# Altium PCB VESC_POWER_60100.PcbDoc
Units mm, origin at the board's own origin, x right, y up, seen from the top; angles counter-clockwise.
Board outline 72 x 52 mm, 4 copper layers (Top Layer, Layer 1, Layer 2, Bottom Layer), stack 1.622 mm thick; 52 components, 20 nets, 124 pads, 672 vias.
Unrouted connection lines stored in the file: 70.
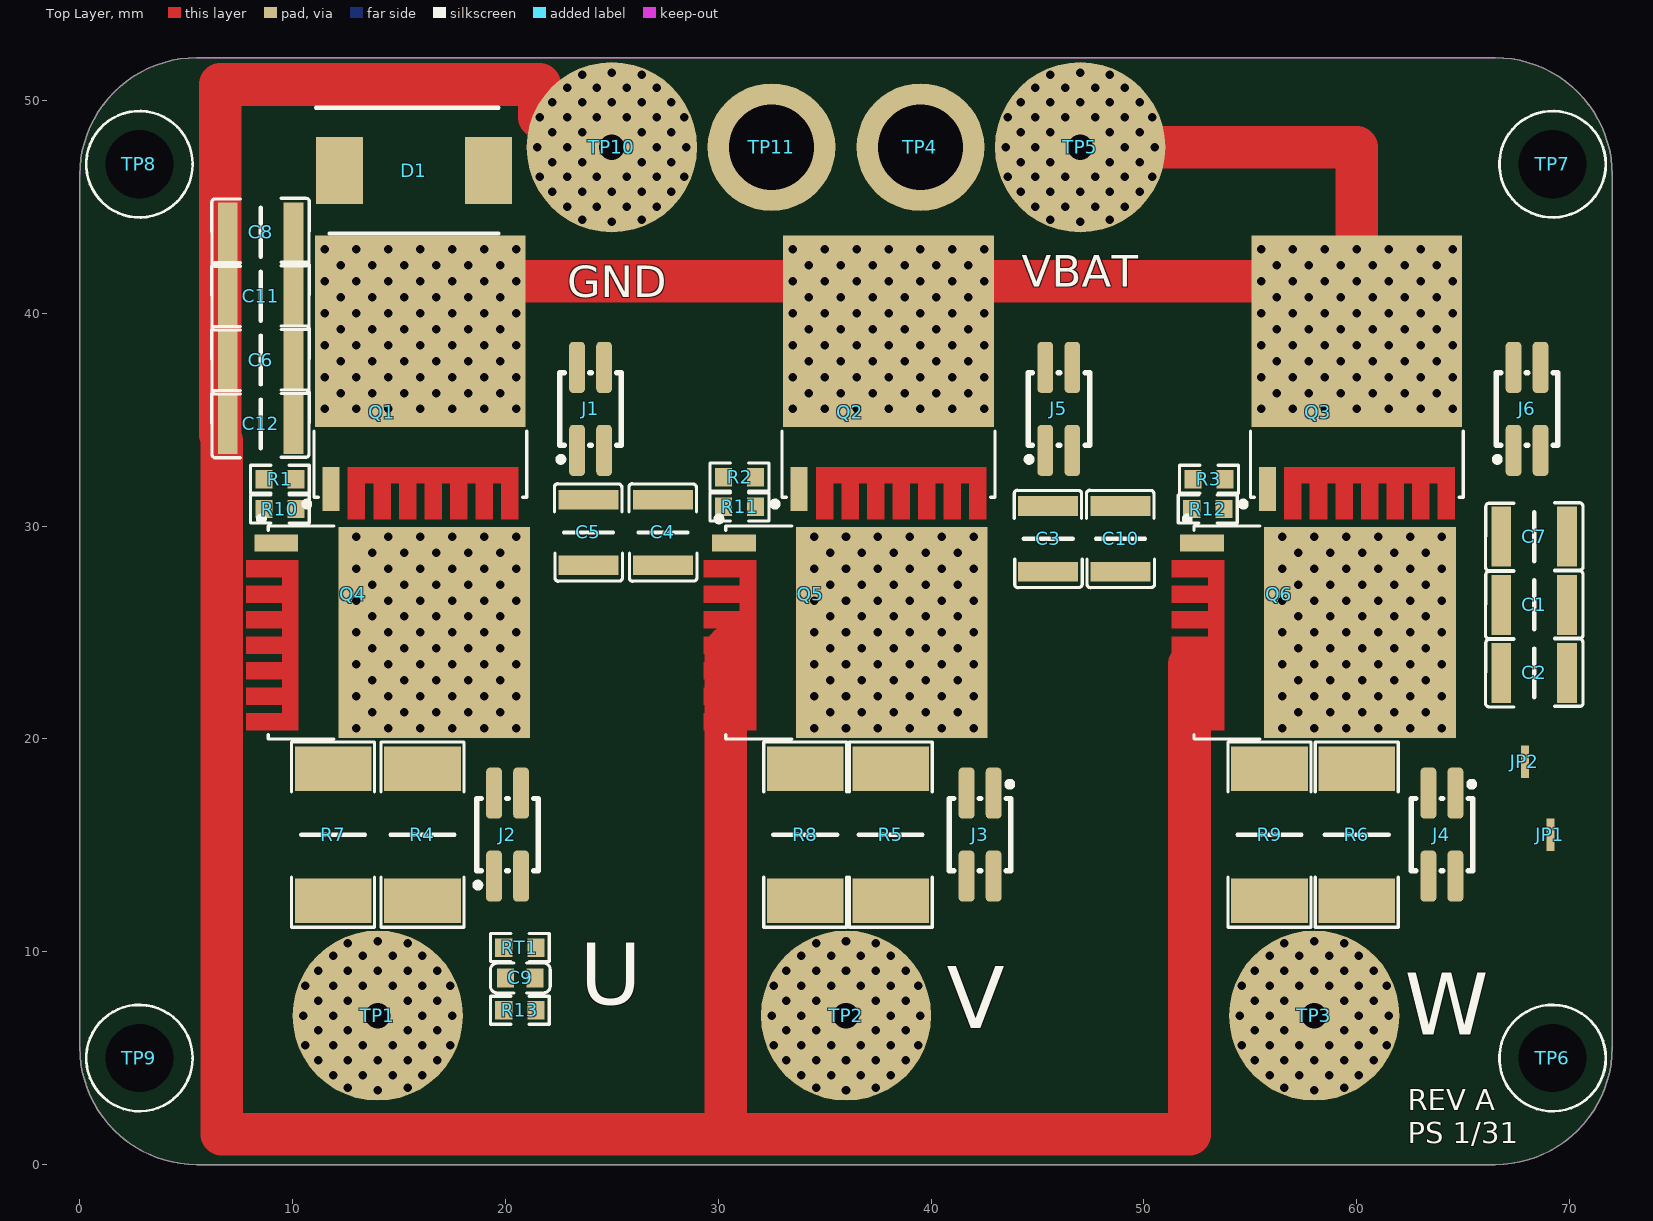
[diagram p0: Top Layer view]
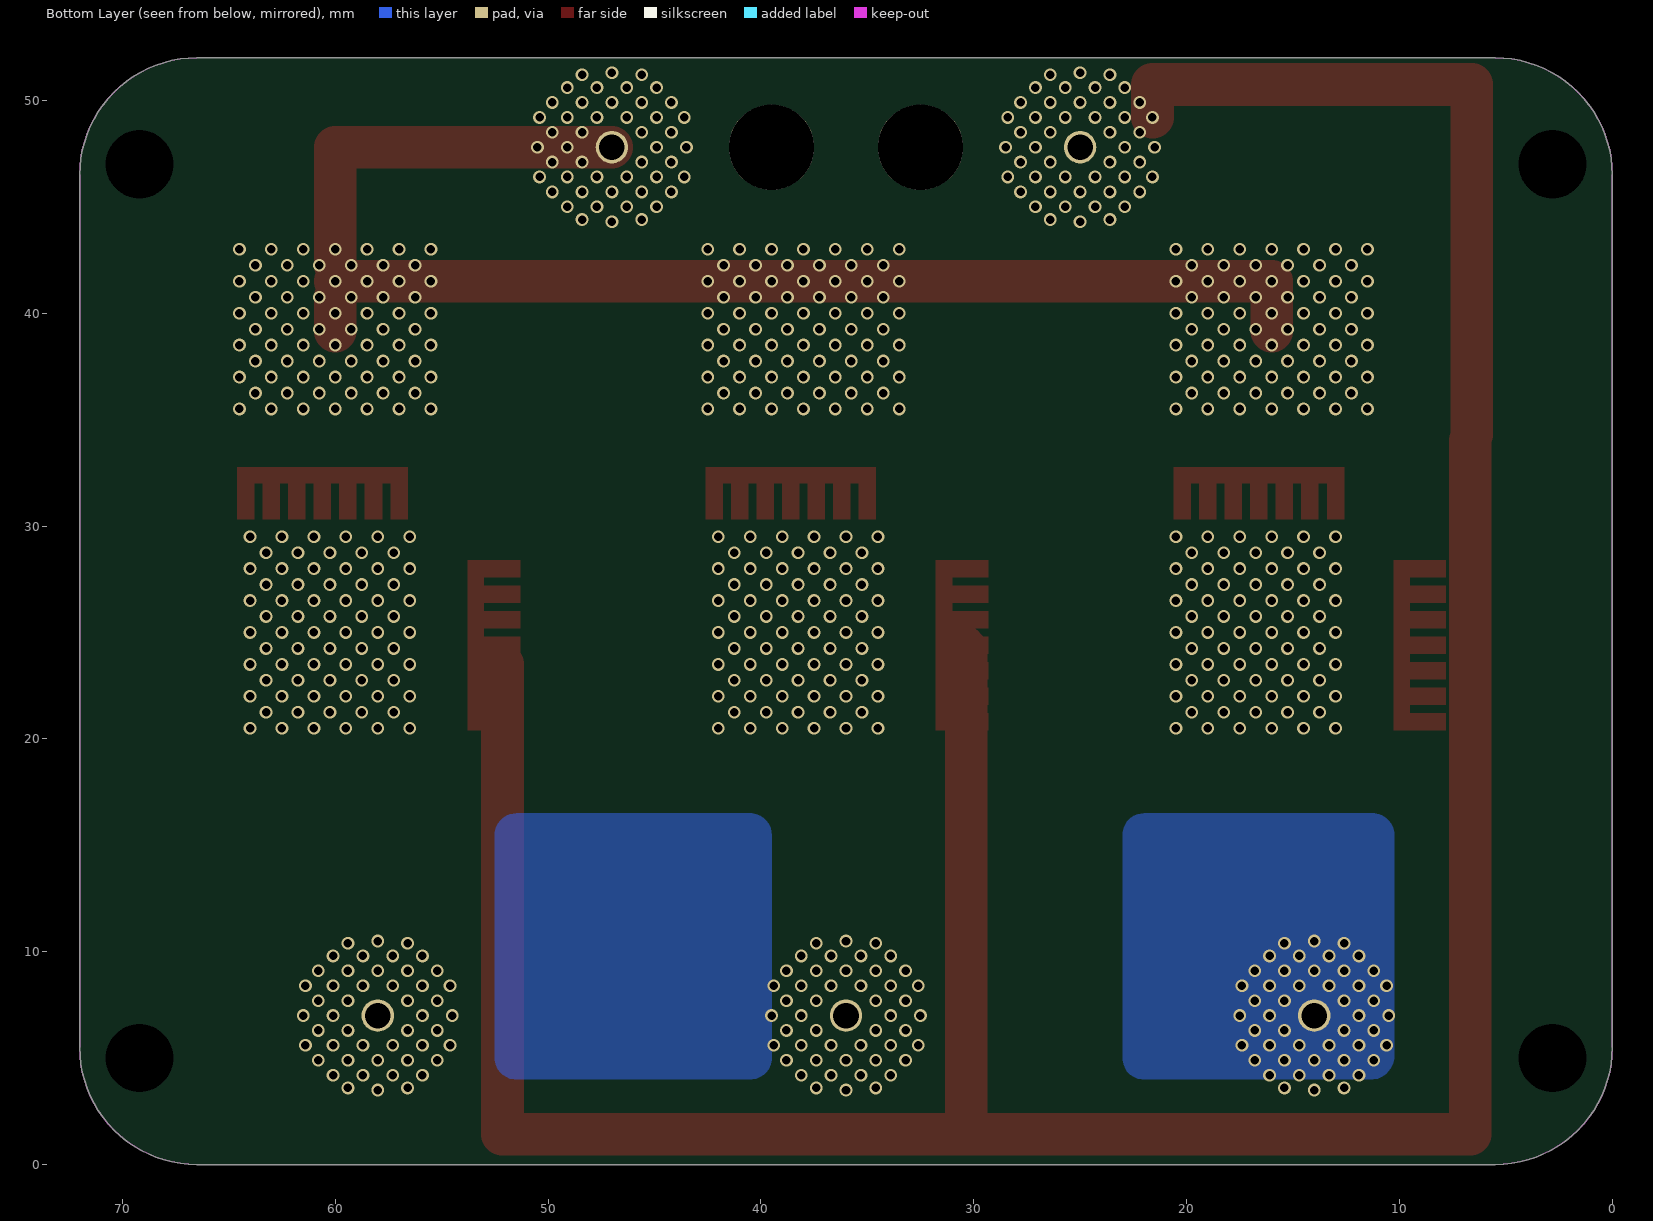
[diagram p1: Bottom Layer view, seen from below]
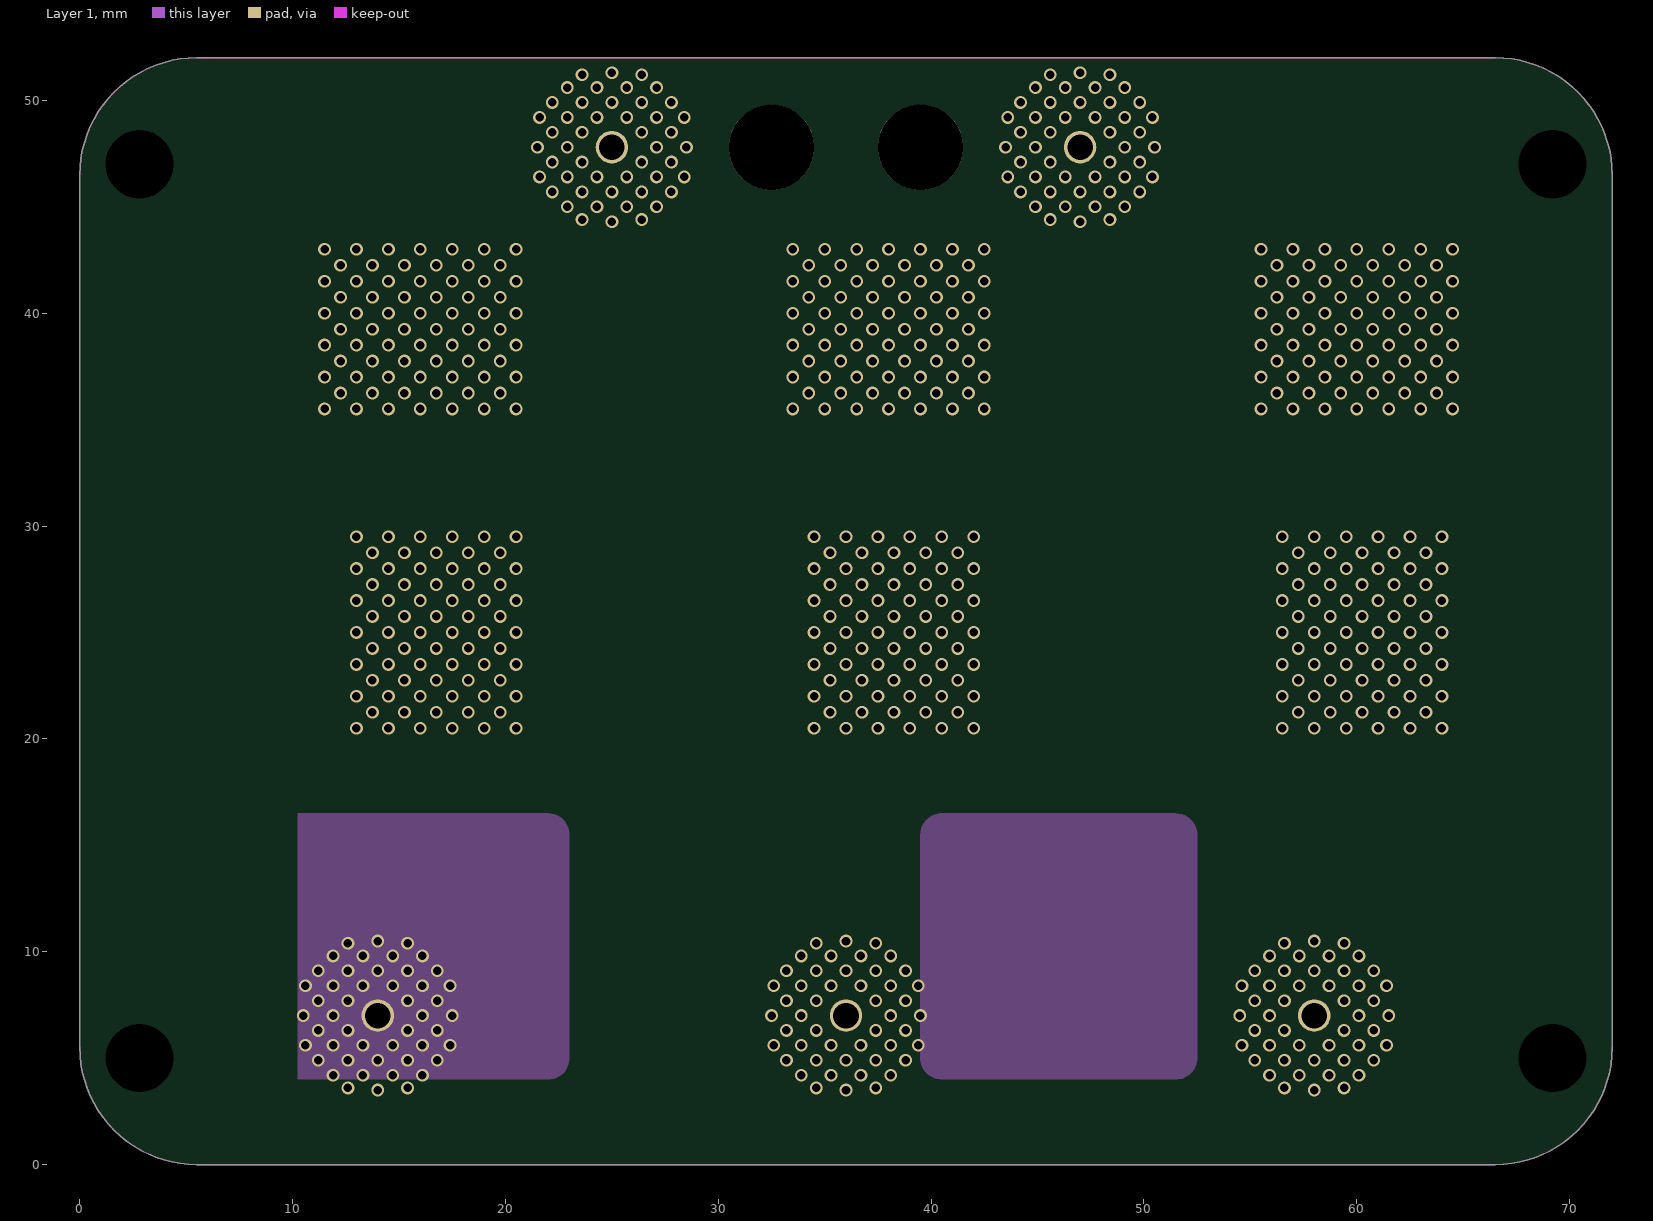
[diagram p2: Layer 1]
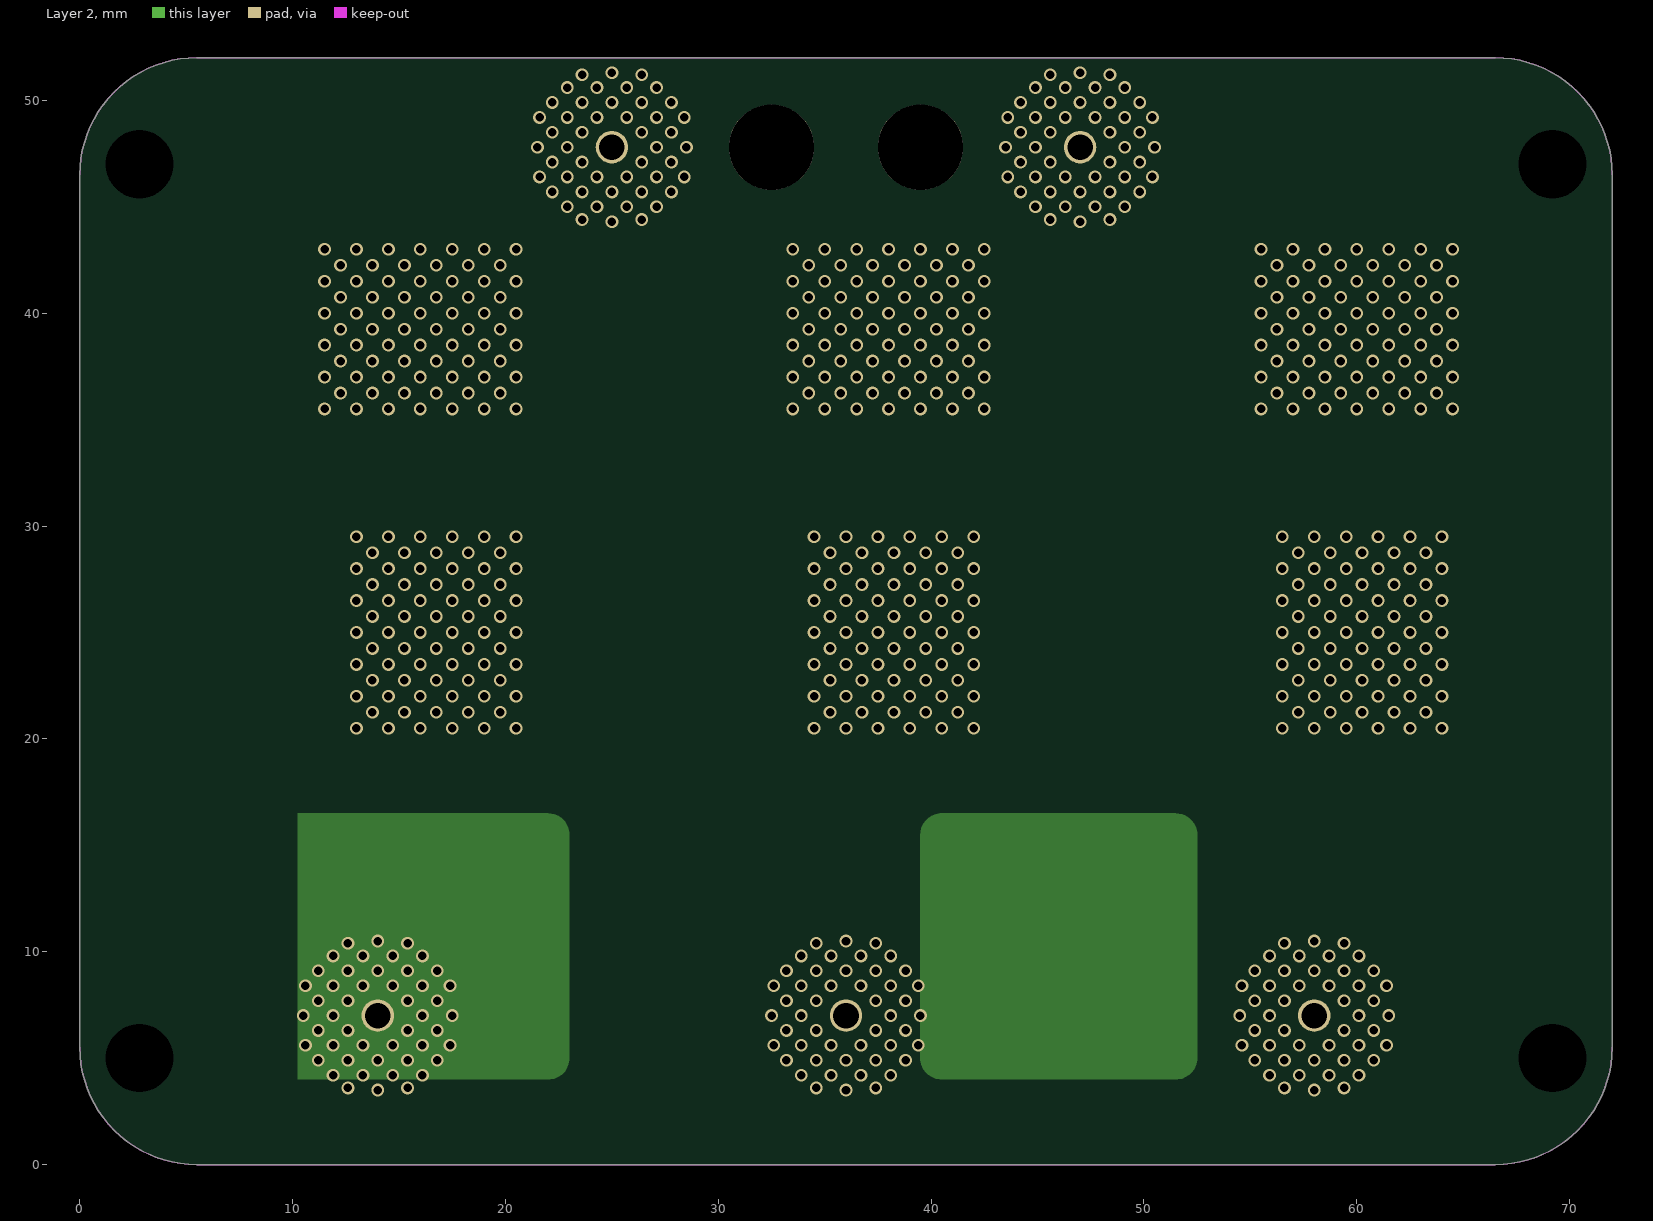
[diagram p3: Layer 2]

## Layer stack, top to bottom
Top Solder: solder mask 0.0102, Solder Resist, Dk 3.5
Top Layer: signal copper 0.035
Dielectric 2: prepreg 0.2083, PP-022, Dk 4.5
Layer 1: signal copper 0.0175
Dielectric 1: core 1.1, Core-024, Dk 4.6
Layer 2: signal copper 0.0175
Dielectric 3: prepreg 0.2083, PP-022, Dk 4.5
Bottom Layer: signal copper 0.035
Bottom Solder: solder mask 0.0102, Solder Resist, Dk 3.5

## Board outline
0,5.5 ccw(c5.5,5.5) 5.5,0 66.5,0 ccw(c66.5,5.5) 72,5.5 72,46.5 ccw(c66.5,46.5) 66.5,52 5.5,52 ccw(c5.5,46.5) 0,46.5

## Design rules (kind name [scope] priority, off if disabled: settings)
BoardOutlineClearance [All] p1: gap=0.254 ignorepadtopadclearanceinfootprint=FALSE except(0: Arc-SplitContinuation Track-SplitContinuation SMDPad-SplitContinuation THPad-SplitContinuation Via-SplitContinuation Fill-SplitContinuation Poly-SplitContinuation Region-SplitContinuation Text-SplitContinuation)
Clearance [All] p1: gap=0.152 ignorepadtopadclearanceinfootprint=FALSE
HoleSize [All] p1: absolutevalues=TRUE maxlimit=5 minlimit=0.025 maxpercent=80.000 minpercent=20.000
HoleToHoleClearance [All] p1: gap=0.229 allowstackedmicrovias=TRUE
MinimumSolderMaskSliver [All] p1: minsoldermaskwidth=0.051
PolygonConnect [All] p1: connectstyle=Direct reliefconductorwidth=0.254 reliefentries=4 polygonreliefangle="90 Angle" airgapwidth=0.254
RoutingVias [All] p1: holewidth=0.711 width=1.27 viastyle="Through Hole" minholewidth=0.711 minwidth=1.27 maxholewidth=0.711 maxwidth=1.27
SilkToSilkClearance [All] p1: silktosilkclearance=0
SilkToSolderMaskClearance [IsPad] p1: minsilkscreentomaskgap=0.025 clearancetoexposedcopper=TRUE
SolderMaskExpansion [All] p1: expansion=0.102 istentingtop=FALSE
SupplyNets "Schematic Supply Nets_2" [InNet('VIN')] p1: voltage=0.000
SupplyNets "Schematic Supply Nets_1" [InNet('3V3')] p2: voltage=0.000
SupplyNets "Schematic Supply Nets" [InNet('GND')] p3: voltage=0.000
Width [All] p1: maxlimit=2.54 minlimit=0.152 preferedwidth=0.254
25 further rules are at their usual default settings.

## Components (designator, comment, footprint, x,y, rotation, side; value= is the part's Value field where it differs from the comment)
C1 "2.2uF/100V" CAPC3225X230N 68.336,26.3 r180 top
C2 "2.2uF/100V" CAPC3225X230N 68.336,23.1 r180 top
C3 "2.2uF/100V" CAPC3225X230N 45.5,29.4 r90 top
C4 "2.2uF/100V" CAPC3225X230N 27.4,29.7 r90 top
C5 "2.2uF/100V" CAPC3225X230N 23.9,29.7 r90 top
C6 "2.2uF/100V" CAPC3225X230N 8.5,37.8 r0 top
C7 "2.2uF/100V" CAPC3225X230N 68.336,29.5 r180 top
C8 "2.2uF/100V" CAPC3225X230N 8.5,43.8 r0 top
C9 "2.2uF/6.3V" C0603 20.696,8.764 r180 top
C10 "2.2uF/100V" CAPC3225X230N 48.9,29.4 r90 top
C11 "2.2uF/100V" CAPC3225X230N 8.5,40.8 r0 top
C12 "2.2uF/100V" CAPC3225X230N 8.5,34.8 r0 top
D1 "SMCJ75A" DIOM7959X262N 15.7,46.7 r0 top
J1 "PZ127-2-02-S" HDR-SMD_4P-P1.27-V-M-R2-C2-LS5.3 24,35.5 r0 top
J2 "PZ127-2-02-S" HDR-SMD_4P-P1.27-V-M-R2-C2-LS5.3 20.1,15.5 r0 top
J3 "PZ127-2-02-S" HDR-SMD_4P-P1.27-V-M-R2-C2-LS5.3 42.3,15.5 r180 top
J4 "PZ127-2-02-S" HDR-SMD_4P-P1.27-V-M-R2-C2-LS5.3 64,15.5 r180 top
J5 "PZ127-2-02-S" HDR-SMD_4P-P1.27-V-M-R2-C2-LS5.3 46,35.5 r0 top
J6 "PZ127-2-02-S" HDR-SMD_4P-P1.27-V-M-R2-C2-LS5.3 68,35.5 r0 top
JP1 "Short" SHORT 69.1,15.5 r90 top
JP2 "Short" SHORT 67.9,18.922 r90 top
Q1 "NCEP023N10LL" TOLL 16,37 r90 top
Q2 "NCEP023N10LL" TOLL 38,37 r90 top
Q3 "NCEP023N10LL" TOLL 60,37 r90 top
Q4 "NCEP023N10LL" TOLL 14.5,25 r0 top
Q5 "NCEP023N10LL" TOLL 36,25 r0 top
Q6 "NCEP023N10LL" TOLL 58,25 r0 top
R1 "5.1K/1%" R0603 9.4,32.2 r0 top
R2 "5.1K/1%" R0603 31,32.3 r0 top
R3 "5.1K/1%" R0603 53.053,32.2 r0 top
R4 "1mR/1%" R2512 16.1,15.5 r90 top
R5 "1mR/1%" R2512 38.1,15.5 r90 top
R6 "1mR/1%" R2512 59.996,15.5 r90 top
R7 "1mR/1%" R2512 11.9,15.5 r90 top
R8 "1mR/1%" R2512 34.084,15.5 r90 top
R9 "1mR/1%" R2512 55.9,15.5 r90 top
R10 "5.1K/1%" R0603 9.4,30.8 r0 top
R11 "5.1K/1%" R0603 31,30.9 r0 top
R12 "5.1K/1%" R0603 53,30.8 r0 top
R13 "10K/1%" R0603 20.676,7.249 r0 top
RT1 "NTC" R0603 20.676,10.194 r0 top
TP1 "PHA" TP_8x8 14,7 r0 top
TP2 "PHB" TP_8x8 36,7 r0 top
TP3 "PHC" TP_8x8 58,7 r0 top
TP4 "GND" TP_6x6 39.5,47.8 r180 top
TP5 "GND" TP_8x8 47,47.8 r180 top
TP6 "TEST POINT" HOLE-3.2MM_M 69.2,5 r0 top
TP7 "TEST POINT" HOLE-3.2MM_M 69.2,47 r0 top
TP8 "TEST POINT" HOLE-3.2MM_M 2.8,47 r0 top
TP9 "TEST POINT" HOLE-3.2MM_M 2.8,5 r0 top
TP10 "VIN" TP_8x8 25,47.8 r180 top
TP11 "VIN" TP_6x6 32.5,47.8 r180 top

## Footprints (in the part's own frame and the unit in brackets; to place one, negate y for a bottom-side part, rotate by r counter-clockwise, add the part's x,y. Pads: shape width x height; smd on the part's side, far side on the other; paste and mask are expansions set on the pad)
C0603 [mm] "C0603"
  rect 0.8x0.9 smd: 1(-0.7,0) 2(0.7,0)
  silkscreen extent -1.41,-0.7 1.4,0.7, body extent -0.8,-0.41 0.8,0.41, height 0.9
CAPC3225X230N [mm]
  rect 0.92x2.82 smd: 1(-1.54,0) 2(1.54,0)
  silkscreen extent -2.3,-1.6 2.28,1.6, body extent -1.6,-1.25 1.6,1.25, height 2.47
DIOM7959X262N [mm]
  rect 2.2x3.15 smd: 1(-3.5,0) 2(3.5,0)
  silkscreen extent -4.6,-2.95 3.97,2.95, body extent -3.97,-2.95 3.97,2.95, height 2.31
HDR-SMD_4P-P1.27-V-M-R2-C2-LS5.3 [mm]
  rrect50% 0.74x2.4 smd paste+0 mask+0.05: 1(-0.635,-1.95) 2(-0.635,1.95) 3(0.635,-1.95) 4(0.635,1.95)
  silkscreen extent -1.52,-2.49 1.45,1.7, body extent -1.27,-2.65 1.27,2.65, height 5.5
HOLE-3.2MM_M [mm]
  round 0 hole 3.2 unplated: 1(0,0)
  silkscreen extent -2.5,-2.5 2.5,2.5
R0603 [mm] "R0603"
  rect 0.806x0.864 smd: 1(-0.753,0) 2(0.753,0)
  silkscreen extent -1.38,-0.66 1.39,0.66, body extent -0.79,-0.43 0.79,0.43, height 0.5
R2512 [mm]
  rect 2.1x3.6 smd: 1(-3.1,0) 2(3.1,0)
  silkscreen extent -4.35,-1.95 4.35,1.95, body extent -3.2,-1.6 3.2,1.6, height 0.8
SHORT [mil] "SHORT"
  rect 30x15 smd paste-99999 mask+0: 1(-14.9,0) 2(14.9,0)
TOLL [mm] "TOLL"
  rect 2.063x0.8 smd: 1(-5.269,4.2)
  rect 9x9.9 smd: 2(2.15,0)
  oct 0.025x0.025 smd: 3(-5.46,-0.6)
  round 0.025 smd: 3(-5.46,-0.6)
  Top Layer region: -6.691,3.4 -4.228,3.4 -4.228,-4.6 -6.691,-4.6 -6.691,-3.8 -4.991,-3.8 -4.991,-3.4 -6.691,-3.4 -6.691,-2.6 -4.991,-2.6 -4.991,-2.2 -6.691,-2.2 -6.691,-1.4 -4.991,-1.4 -4.991,-1 -6.691,-1 -6.691,-0.2 -4.991,-0.2 -4.991,0.2 -6.691,0.2 -6.691,1 -4.991,1 -4.991,1.4 -6.691,1.4 -6.691,2.2 -4.991,2.2 -4.991,2.6 -6.691,2.6
  silkscreen extent -6.1,-5 -2.55,5.46, body extent -6.04,-4.95 5.63,4.95, height 2.3
TP_6x6 [mm] "TP_6x6"
  round 6 smd: 1(0,0)
  round 4 hole 4: 1(0,0)
  body extent -2.75,-2.75 2.74,2.75, height 6
TP_8x8 [mm] "TP_8X8"
  round 8 smd: 1(0,0)
  round 1.524 hole 1.2: 1(0,0)
  body extent -3.75,-3.75 3.74,3.75, height 23

## Part data
C1 C2 C3 C4 C5 C6 C7 C8 C9 C10 C11 C12: library part "CAP NP"
  C1 C2 C3 C4 C5 C6 C7 C8 C10 C11 C12: PCB Footprint=C1206
  C9: PCB Footprint=C0603
D1: "TVS Diode (Uni-directional)", Manufacturer_Name=Bourns, Mouser Part Number=652-SMCJ75A, Arrow Part Number=SMCJ75A, Arrow Price/Stock=https://www.arrow.com/en/products/smcj75a/bourns?region=nac, Datasheet Link=https://www.bourns.com/docs/Product-Datasheets/SMCJ.pdf, Height=2.62mm, Manufacturer_Part_Number=SMCJ75A, Mouser Price/Stock=https://www.mouser.co.uk/ProductDetail/Bourns/SMCJ75A?qs=%252Bf8Cd6aE5bzxrdYbQ%252Bf9mA%3D%3D
J1 J2 J3 J4 J5 J6: Color=黑色, Current Rating (Max)=1A, JLCPCB Part Class="Extended Part", LCSC Part Name="2x2P 间距:1.27mm 方针 立贴", Manufacturer=HCTL(华灿天禄), Operating Temperature Range=-40℃~+105℃, Soldering Temperature(Max)=260℃@10S, Add into BOM=yes, Circluar Pins/Square Pins=方针, Contact Material=黄铜, Convert to PCB=yes, Datasheet=https://atta.szlcsc.com/upload/public/pdf/source/20230609/2ACB07ADC7D4DAF6D292F3D23C037F6C.pdf, Device=PZ127-2-02-S, Insulation Height=1.5mm, Length of End Connection Pin=-, Length of Mating Pin=4mm, Manufacturer Part=PZ127-2-02-S, Mounting Type=立贴, Number of Pins=4P, Number of Rows=双排, Pin Structure=2x2P, Pitch=1.27mm, Row Spacing=1.27mm, Supplier=LCSC, Supplier Footprint=SMD,P=1.27mm, Supplier Part=C3975185, Symbol=PZ127-2-02-S
JP1 JP2: library part SHORT, "2 PIN SHORTED TO CONNECT DIFFERENT NETS", CLASS=DISCRETE, PART_NUMBER=TMP-442
Q1 Q2 Q3 Q4 Q5 Q6: library part "MOSFET N", PCB Footprint=TOLL
R1 R2 R3 R4 R5 R6 R7 R8 R9 R10 R11 R12 R13: library part RESISTOR
  R1 R2 R3 R10 R11 R12 R13: PCB Footprint=R0603
  R4 R5 R6 R7 R8 R9: PCB Footprint=R3920
TP1 TP2 TP3 TP4 TP5 TP10 TP11: library part "TEST POINT", PCB Footprint=TP_8x8
RT1: PCB Footprint=R0603

## Via types
v1: diameter 0.6, hole 0.4, Top Layer to Bottom Layer, tented both sides, 672 vias

## Nets (pads, with @x,y where several pads share a name; then routed paths per layer and width w, separated by ;. In a path a pad name is that pad's centre, name@x,y a point inside that pad or via, vN(x,y) a via of type N, cw(c..) or ccw(c..) an arc to the next point about the centre after c; other vN are vias at no path point)
3V3: RT1.1
ADC_TEMP: C9.1 J2.4 R13.2 RT1.2
ADC_TEMP2: J3.4
ADC_TEMP3: J4.4
GHA: J2.1 Q1.1 R1.2
GHB: J4.1 Q2.1 R2.2
GHC: J1.2 Q3.1 R3.2
GLA: J2.2 Q4.1 R10.2
GLB: J4.2 Q5.1 R11.2
GLC: J1.1 Q6.1 R12.2
GND: C1.1 C2.1 C3.1 C4.1 C5.1 C6.1 C7.1 C8.1 C9.2 C10.1 C11.1 C12.1 D1.2 J3.2 JP1.1 JP2.1 Q4.3 Q5.3 Q6.3 R10.1 R11.1 R12.1 R13.1 TP10.1 TP11.1 | length 156.2
  Top Layer w2: C12.1@6.6,34.3 6.6,37.8 6.6,40.8 6.6,43.8 6.6,50.746 21.6,50.746 v1(21.6,49.2) ; C12.1@6.66,34 6.66,1.414 30.345,1.414 ; Q5.3@30.54,24.4 30.345,24.205 30.345,1.414 ; 52.14,23.5 52.14,1.414 30.345,1.414
  other v1: 25,44.3 23.6,44.4 26.4,44.4 22.9,45 24.3,45 25.7,45 27.1,45 22.2,45.7 23.6,45.7 25,45.7 26.4,45.7 27.8,45.7 21.6,46.4 22.9,46.4 24.3,46.4 25.7,46.4 27.1,46.4 28.4,46.4 22.2,47.1 23.6,47.1 26.4,47.1 27.8,47.1 21.5,47.8 22.9,47.8 27.1,47.8 28.5,47.8 22.2,48.5 23.6,48.5 26.4,48.5 27.8,48.5 22.9,49.2 24.3,49.2 25.7,49.2 27.1,49.2 28.4,49.2 22.2,49.9 23.6,49.9 25,49.9 26.4,49.9 27.8,49.9 22.9,50.6 24.3,50.6 25.7,50.6 27.1,50.6 23.6,51.2 26.4,51.2 25,51.3
NetJ1_3: J1.3 JP1.2
NetJ3_3: J3.3 JP2.2
PHA: R4.1 R7.1 TP1.1
  other v1: 14,3.5 12.6,3.6 15.4,3.6 11.9,4.2 13.3,4.2 14.7,4.2 16.1,4.2 11.2,4.9 12.6,4.9 14,4.9 15.4,4.9 16.8,4.9 10.6,5.6 11.9,5.6 13.3,5.6 14.7,5.6 16.1,5.6 17.4,5.6 11.2,6.3 12.6,6.3 15.4,6.3 16.8,6.3 10.5,7 11.9,7 16.1,7 17.5,7 11.2,7.7 12.6,7.7 15.4,7.7 16.8,7.7 10.6,8.4 11.9,8.4 13.3,8.4 14.7,8.4 16.1,8.4 17.4,8.4 11.2,9.1 12.6,9.1 14,9.1 15.4,9.1 16.8,9.1 11.9,9.8 13.3,9.8 14.7,9.8 16.1,9.8 12.6,10.4 15.4,10.4 14,10.5
PHB: R5.1 R8.1 TP2.1
  other v1: 36,3.5 34.6,3.6 37.4,3.6 33.9,4.2 35.3,4.2 36.7,4.2 38.1,4.2 33.2,4.9 34.6,4.9 36,4.9 37.4,4.9 38.8,4.9 32.6,5.6 33.9,5.6 35.3,5.6 36.7,5.6 38.1,5.6 39.4,5.6 33.2,6.3 34.6,6.3 37.4,6.3 38.8,6.3 32.5,7 33.9,7 38.1,7 39.5,7 33.2,7.7 34.6,7.7 37.4,7.7 38.8,7.7 32.6,8.4 33.9,8.4 35.3,8.4 36.7,8.4 38.1,8.4 39.4,8.4 33.2,9.1 34.6,9.1 36,9.1 37.4,9.1 38.8,9.1 33.9,9.8 35.3,9.8 36.7,9.8 38.1,9.8 34.6,10.4 37.4,10.4 36,10.5
PHC: R6.1 R9.1 TP3.1
  other v1: 58,3.5 56.6,3.6 59.4,3.6 55.9,4.2 57.3,4.2 58.7,4.2 60.1,4.2 55.2,4.9 56.6,4.9 58,4.9 59.4,4.9 60.8,4.9 54.6,5.6 55.9,5.6 57.3,5.6 58.7,5.6 60.1,5.6 61.4,5.6 55.2,6.3 56.6,6.3 59.4,6.3 60.8,6.3 54.5,7 55.9,7 60.1,7 61.5,7 55.2,7.7 56.6,7.7 59.4,7.7 60.8,7.7 54.6,8.4 55.9,8.4 57.3,8.4 58.7,8.4 60.1,8.4 61.4,8.4 55.2,9.1 56.6,9.1 58,9.1 59.4,9.1 60.8,9.1 55.9,9.8 57.3,9.8 58.7,9.8 60.1,9.8 56.6,10.4 59.4,10.4 58,10.5
SHA: J2.3 Q1.3 Q4.2 R1.1 R4.2 R7.2
  other v1: 13,20.5 14.5,20.5 16,20.5 17.5,20.5 19,20.5 20.5,20.5 13.75,21.25 15.25,21.25 16.75,21.25 18.25,21.25 19.75,21.25 13,22 14.5,22 16,22 17.5,22 19,22 20.5,22 13.75,22.75 15.25,22.75 16.75,22.75 18.25,22.75 19.75,22.75 13,23.5 14.5,23.5 16,23.5 17.5,23.5 19,23.5 20.5,23.5 13.75,24.25 15.25,24.25 16.75,24.25 18.25,24.25 19.75,24.25 13,25 14.5,25 16,25 17.5,25 19,25 20.5,25 13.75,25.75 15.25,25.75 16.75,25.75 18.25,25.75 19.75,25.75 13,26.5 14.5,26.5 16,26.5 17.5,26.5 19,26.5 20.5,26.5 13.75,27.25 15.25,27.25 16.75,27.25 18.25,27.25 19.75,27.25 13,28 14.5,28 16,28 17.5,28 19,28 20.5,28 13.75,28.75 15.25,28.75 16.75,28.75 18.25,28.75 19.75,28.75 13,29.5 14.5,29.5 16,29.5 17.5,29.5 19,29.5 20.5,29.5
SHB: J4.3 Q2.3 Q5.2 R2.1 R5.2 R8.2
  other v1: 34.5,20.5 36,20.5 37.5,20.5 39,20.5 40.5,20.5 42,20.5 35.25,21.25 36.75,21.25 38.25,21.25 39.75,21.25 41.25,21.25 34.5,22 36,22 37.5,22 39,22 40.5,22 42,22 35.25,22.75 36.75,22.75 38.25,22.75 39.75,22.75 41.25,22.75 34.5,23.5 36,23.5 37.5,23.5 39,23.5 40.5,23.5 42,23.5 35.25,24.25 36.75,24.25 38.25,24.25 39.75,24.25 41.25,24.25 34.5,25 36,25 37.5,25 39,25 40.5,25 42,25 35.25,25.75 36.75,25.75 38.25,25.75 39.75,25.75 41.25,25.75 34.5,26.5 36,26.5 37.5,26.5 39,26.5 40.5,26.5 42,26.5 35.25,27.25 36.75,27.25 38.25,27.25 39.75,27.25 41.25,27.25 34.5,28 36,28 37.5,28 39,28 40.5,28 42,28 35.25,28.75 36.75,28.75 38.25,28.75 39.75,28.75 41.25,28.75 34.5,29.5 36,29.5 37.5,29.5 39,29.5 40.5,29.5 42,29.5
SHC: J1.4 Q3.3 Q6.2 R3.1 R6.2 R9.2
  other v1: 56.5,20.5 58,20.5 59.5,20.5 61,20.5 62.5,20.5 64,20.5 57.25,21.25 58.75,21.25 60.25,21.25 61.75,21.25 63.25,21.25 56.5,22 58,22 59.5,22 61,22 62.5,22 64,22 57.25,22.75 58.75,22.75 60.25,22.75 61.75,22.75 63.25,22.75 56.5,23.5 58,23.5 59.5,23.5 61,23.5 62.5,23.5 64,23.5 57.25,24.25 58.75,24.25 60.25,24.25 61.75,24.25 63.25,24.25 56.5,25 58,25 59.5,25 61,25 62.5,25 64,25 57.25,25.75 58.75,25.75 60.25,25.75 61.75,25.75 63.25,25.75 56.5,26.5 58,26.5 59.5,26.5 61,26.5 62.5,26.5 64,26.5 57.25,27.25 58.75,27.25 60.25,27.25 61.75,27.25 63.25,27.25 56.5,28 58,28 59.5,28 61,28 62.5,28 64,28 57.25,28.75 58.75,28.75 60.25,28.75 61.75,28.75 63.25,28.75 56.5,29.5 58,29.5 59.5,29.5 61,29.5 62.5,29.5 64,29.5
VIN: C1.2 C2.2 C3.2 C4.2 C5.2 C6.2 C7.2 C8.2 C10.2 C11.2 C12.2 D1.1 J3.1 Q1.2 Q2.2 Q3.2 TP4.1 TP5.1 | length 66.5
  Top Layer w2: Q1.2 v1(16,40) v1(16,41.5) v1(17.5,41.5) v1(19,41.5) v1(20.5,41.5) v1(33.5,41.5) v1(35,41.5) v1(36.5,41.5) v1(38,41.5) v1(39.5,41.5) v1(41,41.5) v1(42.5,41.5) v1(55.5,41.5) v1(57,41.5) v1(58.5,41.5) v1(60,41.5) ; TP5.1@47,47.8 v1(49.1,47.8) v1(50.5,47.8) 60,47.8 v1(60,43) Q3.2@60,42.25 ; Q3.2 v1(60,40) Q3.2@60,40.75
  other v1: 11.5,35.5 13,35.5 14.5,35.5 16,35.5 17.5,35.5 19,35.5 20.5,35.5 33.5,35.5 35,35.5 36.5,35.5 38,35.5 39.5,35.5 41,35.5 42.5,35.5 55.5,35.5 57,35.5 58.5,35.5 60,35.5 61.5,35.5 63,35.5 64.5,35.5 12.25,36.25 13.75,36.25 15.25,36.25 16.75,36.25 18.25,36.25 19.75,36.25 34.25,36.25 35.75,36.25 37.25,36.25 38.75,36.25 40.25,36.25 41.75,36.25 56.25,36.25 57.75,36.25 59.25,36.25 60.75,36.25 62.25,36.25 63.75,36.25 11.5,37 13,37 14.5,37 16,37 17.5,37 19,37 20.5,37 33.5,37 35,37 36.5,37 38,37 39.5,37 41,37 42.5,37 55.5,37 57,37 58.5,37 60,37 61.5,37 63,37 64.5,37 12.25,37.75 13.75,37.75 15.25,37.75 16.75,37.75 18.25,37.75 19.75,37.75 34.25,37.75 35.75,37.75 37.25,37.75 38.75,37.75 40.25,37.75 41.75,37.75 56.25,37.75 57.75,37.75 59.25,37.75 60.75,37.75 62.25,37.75 63.75,37.75 11.5,38.5 13,38.5 14.5,38.5 16,38.5 17.5,38.5 19,38.5 20.5,38.5 33.5,38.5 35,38.5 36.5,38.5 38,38.5 39.5,38.5 41,38.5 42.5,38.5 55.5,38.5 57,38.5 58.5,38.5 60,38.5 61.5,38.5 63,38.5 64.5,38.5 12.25,39.25 13.75,39.25 15.25,39.25 16.75,39.25 18.25,39.25 19.75,39.25 34.25,39.25 35.75,39.25 37.25,39.25 38.75,39.25 40.25,39.25 41.75,39.25 56.25,39.25 57.75,39.25 59.25,39.25 60.75,39.25 62.25,39.25 63.75,39.25 11.5,40 13,40 14.5,40 17.5,40 19,40 20.5,40 33.5,40 35,40 36.5,40 38,40 39.5,40 41,40 42.5,40 55.5,40 57,40 58.5,40 61.5,40 63,40 64.5,40 12.25,40.75 13.75,40.75 15.25,40.75 16.75,40.75 18.25,40.75 19.75,40.75 34.25,40.75 35.75,40.75 37.25,40.75 38.75,40.75 40.25,40.75 41.75,40.75 56.25,40.75 57.75,40.75 59.25,40.75 60.75,40.75 62.25,40.75 63.75,40.75 11.5,41.5 13,41.5 14.5,41.5 61.5,41.5 63,41.5 64.5,41.5 12.25,42.25 13.75,42.25 15.25,42.25 16.75,42.25 18.25,42.25 19.75,42.25 34.25,42.25 35.75,42.25 37.25,42.25 38.75,42.25 40.25,42.25 41.75,42.25 56.25,42.25 57.75,42.25 59.25,42.25 60.75,42.25 62.25,42.25 63.75,42.25 11.5,43 13,43 14.5,43 16,43 17.5,43 19,43 20.5,43 33.5,43 35,43 36.5,43 38,43 39.5,43 41,43 42.5,43 55.5,43 57,43 58.5,43 61.5,43 63,43 64.5,43 47,44.3 45.6,44.4 48.4,44.4 44.9,45 46.3,45 47.7,45 49.1,45 44.2,45.7 45.6,45.7 47,45.7 48.4,45.7 49.8,45.7 43.6,46.4 44.9,46.4 46.3,46.4 47.7,46.4 49.1,46.4 50.4,46.4 44.2,47.1 45.6,47.1 48.4,47.1 49.8,47.1 43.5,47.8 44.9,47.8 44.2,48.5 45.6,48.5 48.4,48.5 49.8,48.5 43.6,49.2 44.9,49.2 46.3,49.2 47.7,49.2 49.1,49.2 50.4,49.2 44.2,49.9 45.6,49.9 47,49.9 48.4,49.9 49.8,49.9 44.9,50.6 46.3,50.6 47.7,50.6 49.1,50.6 45.6,51.2 48.4,51.2 47,51.3
pads on no net: J5.1 J5.2 J5.3 J5.4 J6.1 J6.2 J6.3 J6.4 TP6.1 TP7.1 TP8.1 TP9.1

## Polygon pours and split planes (outlines as drawn)
PHB on Bottom Layer "PHB_L04_P044" (solid, pour order 44): 52.5,5 52.5,15.5 ccw(c51.5,15.5) 51.5,16.5 40.5,16.5 ccw(c40.5,15.5) 39.5,15.5 39.5,5 ccw(c40.5,5) 40.5,4 51.5,4 ccw(c51.5,5)
PHA on Bottom Layer "PHA_L04_P043" (solid, pour order 43): 10.25,5.094 ccw(c11.344,5.094) 11.344,4 22,4 ccw(c22,5) 23,5 23,15.5 ccw(c22,15.5) 22,16.5 11.44,16.5 11.248,16.5 ccw(c11.248,15.502) 10.25,15.502
PHB on Layer 1 "PHB_L02_P031" (solid, pour order 31): 52.5,5 52.5,15.5 ccw(c51.5,15.5) 51.5,16.5 40.5,16.5 ccw(c40.5,15.5) 39.5,15.5 39.5,5 ccw(c40.5,5) 40.5,4 51.5,4 ccw(c51.5,5)
PHA on Layer 1 "PHA_L02_P027" (solid, pour order 27): 23,5 23,15.5 ccw(c22,15.5) 22,16.5 10.234,16.5 10.234,4 22,4 ccw(c22,5)
PHB on Layer 2 "PHB_L03_P035" (solid, pour order 35): 52.5,5 52.5,15.5 ccw(c51.5,15.5) 51.5,16.5 40.5,16.5 ccw(c40.5,15.5) 39.5,15.5 39.5,5 ccw(c40.5,5) 40.5,4 51.5,4 ccw(c51.5,5)
PHA on Layer 2 "PHA_L03_P034" (solid, pour order 34): 23,5 23,15.5 ccw(c22,15.5) 22,16.5 10.249,16.5 10.249,4 22,4 ccw(c22,5)

## Keep-outs
Keep-Out Layer:
  lines w0.025: 66.5,0 ccw(c66.5,5.5) 72,5.5 72,46.5 ccw(c66.5,46.5) 66.5,52 ; 66.5,0 5.5,0 cw(c5.5,5.5) 0,5.5 0,46.5 cw(c5.5,46.5) 5.5,52 66.5,52 ; 66.5,52 66.5,52

## Silkscreen, mask and mechanical layers (free items; w line width, h text height)
Top Overlay:
  text "VBAT" at 44.251,41.25 h1.5
  text "GND" at 22.901,40.75 h1.5
  text "U" at 23.482,6.542 h5
  text "V" at 40.728,5.442 h5
  text "W" at 62.245,5.142 h5
  text "REV A" at 62.405,2.541 h1
  text "PS 1/31" at 62.405,0.995 h1
Drill Drawing:
  circle w0.254: c4.318,67.13 r0.7
  lines w0.254: 3.618,69.579 5.018,69.579 5.018,70.978 3.618,70.978 3.618,69.579 ; 3.618,74.127 5.018,74.127 4.318,72.728 3.618,74.127 ; 3.618,76.226 3.968,76.226 4.318,75.876 4.668,76.226 5.018,76.226 4.668,76.576 5.018,76.926 4.668,76.926 4.318,77.275 3.968,76.926 3.618,76.926 3.968,76.576 3.618,76.226
  lines w0.381: 2.349,65.486 94.193,65.486 ; 2.349,78.08 94.193,78.08 ; 10.446,62.337 10.446,81.229 ; 17.859,62.337 17.859,81.229 ; 32.53,62.337 32.53,81.229 ; 38.809,62.337 38.809,81.229 ; 47.95,62.337 47.95,81.229 ; 65.247,62.337 65.247,81.229 ; 72.736,62.337 72.736,81.229 ; 82.522,62.337 82.522,81.229 ; 2.349,62.337 94.193,62.337 94.193,81.229 2.349,81.229 2.349,62.337
  text "Symbol" at 4.239,79.025 h1.83
  text "Count" at 11.39,79.025 h1.83
  text "Hole Size" at 18.803,79.025 h1.83
  text "Plated" at 33.474,79.025 h1.83
  text "Hole Type" at 39.753,79.025 h1.83
  text "Drill Layer Pair" at 48.894,79.025 h1.83
  text "Via/Pad" at 66.191,79.025 h1.83
  text "Pad Shape" at 73.681,79.025 h1.83
  text "Template" at 83.466,79.025 h1.83
  text "2" at 11.39,75.876 h1.52
  text "4.000mm (157.48mil)" at 18.803,75.876 h1.52
  text "PTH" at 33.474,75.876 h1.52
  text "Round" at 39.753,75.876 h1.52
  text "Top Layer - Bottom Layer" at 48.894,75.876 h1.52
  text "Pad" at 66.191,75.876 h1.52
  text "Rounded" at 73.681,75.876 h1.52
  text "c400h400" at 83.466,75.876 h1.52
  text "4" at 11.39,72.728 h1.52
  text "3.200mm (125.98mil)" at 18.803,72.728 h1.52
  text "NPTH" at 33.474,72.728 h1.52
  text "Round" at 39.753,72.728 h1.52
  text "Top Layer - Bottom Layer" at 48.894,72.728 h1.52
  text "Pad" at 66.191,72.728 h1.52
  text "Rounded" at 73.681,72.728 h1.52
  text "c0hn320" at 83.466,72.728 h1.52
  text "5" at 11.39,69.579 h1.52
  text "1.200mm (47.24mil)" at 18.803,69.579 h1.52
  text "PTH" at 33.474,69.579 h1.52
  text "Round" at 39.753,69.579 h1.52
  text "Top Layer - Bottom Layer" at 48.894,69.579 h1.52
  text "Pad" at 66.191,69.579 h1.52
  text "Rounded" at 73.681,69.579 h1.52
  text "c152h120" at 83.466,69.579 h1.52
  text "672" at 11.39,66.43 h1.52
  text "0.400mm (15.75mil)" at 18.803,66.43 h1.52
  text "PTH" at 33.474,66.43 h1.52
  text "Round" at 39.753,66.43 h1.52
  text "Top Layer - Bottom Layer" at 48.894,66.43 h1.52
  text "Via" at 66.191,66.43 h1.52
  text "Rounded" at 73.681,66.43 h1.52
  text "v60h40m0mx0" at 83.466,66.43 h1.52
  text "683 Total" at 11.39,63.282 h1.52

## Text inside footprints (layer, text, board x,y; h text height)
C9: Mechanical 8 "1" at 21.65,8.764 h0.64 r180; Mechanical 8 "2" at 20.25,8.764 h0.64 r180
Q1: Mechanical 8 "1" at 11.592,31.15 h0.64 r90; Mechanical 8 "3" at 16.392,31.05 h0.64 r90; Mechanical 8 "2" at 16.762,39.15 h0.64 r180
Q2: Mechanical 8 "1" at 33.592,31.15 h0.64 r90; Mechanical 8 "3" at 38.392,31.05 h0.64 r90; Mechanical 8 "2" at 38.762,39.15 h0.64 r180
Q3: Mechanical 8 "2" at 60.762,39.15 h0.64 r180; Mechanical 8 "3" at 60.392,31.05 h0.64 r90; Mechanical 8 "1" at 55.592,31.15 h0.64 r90
Q4: Mechanical 8 "1" at 8.65,29.408 h0.64; Mechanical 8 "3" at 8.55,24.608 h0.64; Mechanical 8 "2" at 16.65,24.238 h0.64 r90
Q5: Mechanical 8 "2" at 38.15,24.238 h0.64 r90; Mechanical 8 "3" at 30.05,24.608 h0.64; Mechanical 8 "1" at 30.15,29.408 h0.64
Q6: Mechanical 8 "1" at 52.15,29.408 h0.64; Mechanical 8 "3" at 52.05,24.608 h0.64; Mechanical 8 "2" at 60.15,24.238 h0.64 r90
R1: Mechanical 8 "1" at 9.308,32 h0.64; Mechanical 8 "2" at 10.908,32 h0.64
R2: Mechanical 8 "1" at 30.908,32.1 h0.64; Mechanical 8 "2" at 32.508,32.1 h0.64
R3: Mechanical 8 "2" at 54.561,32 h0.64; Mechanical 8 "1" at 52.961,32 h0.64
R10: Mechanical 8 "2" at 10.908,30.6 h0.64; Mechanical 8 "1" at 9.308,30.6 h0.64
R11: Mechanical 8 "2" at 32.508,30.7 h0.64; Mechanical 8 "1" at 30.908,30.7 h0.64
R12: Mechanical 8 "2" at 54.508,30.6 h0.64; Mechanical 8 "1" at 52.908,30.6 h0.64
R13: Mechanical 8 "1" at 20.584,7.049 h0.64; Mechanical 8 "2" at 22.184,7.049 h0.64
RT1: Mechanical 8 "1" at 20.584,9.994 h0.64; Mechanical 8 "2" at 22.184,9.994 h0.64
TP1: Mechanical 8 "1" at 12.222,7 h0.64
TP2: Mechanical 8 "1" at 34.222,7 h0.64
TP3: Mechanical 8 "1" at 56.222,7 h0.64
TP4: Mechanical 8 "1" at 41.278,47.8 h0.64 r180
TP5: Mechanical 8 "1" at 48.778,47.8 h0.64 r180
TP10: Mechanical 8 "1" at 26.778,47.8 h0.64 r180
TP11: Mechanical 8 "1" at 34.278,47.8 h0.64 r180